# EAGLE board LEDDriver_v_3 (EAGLE 6.4)
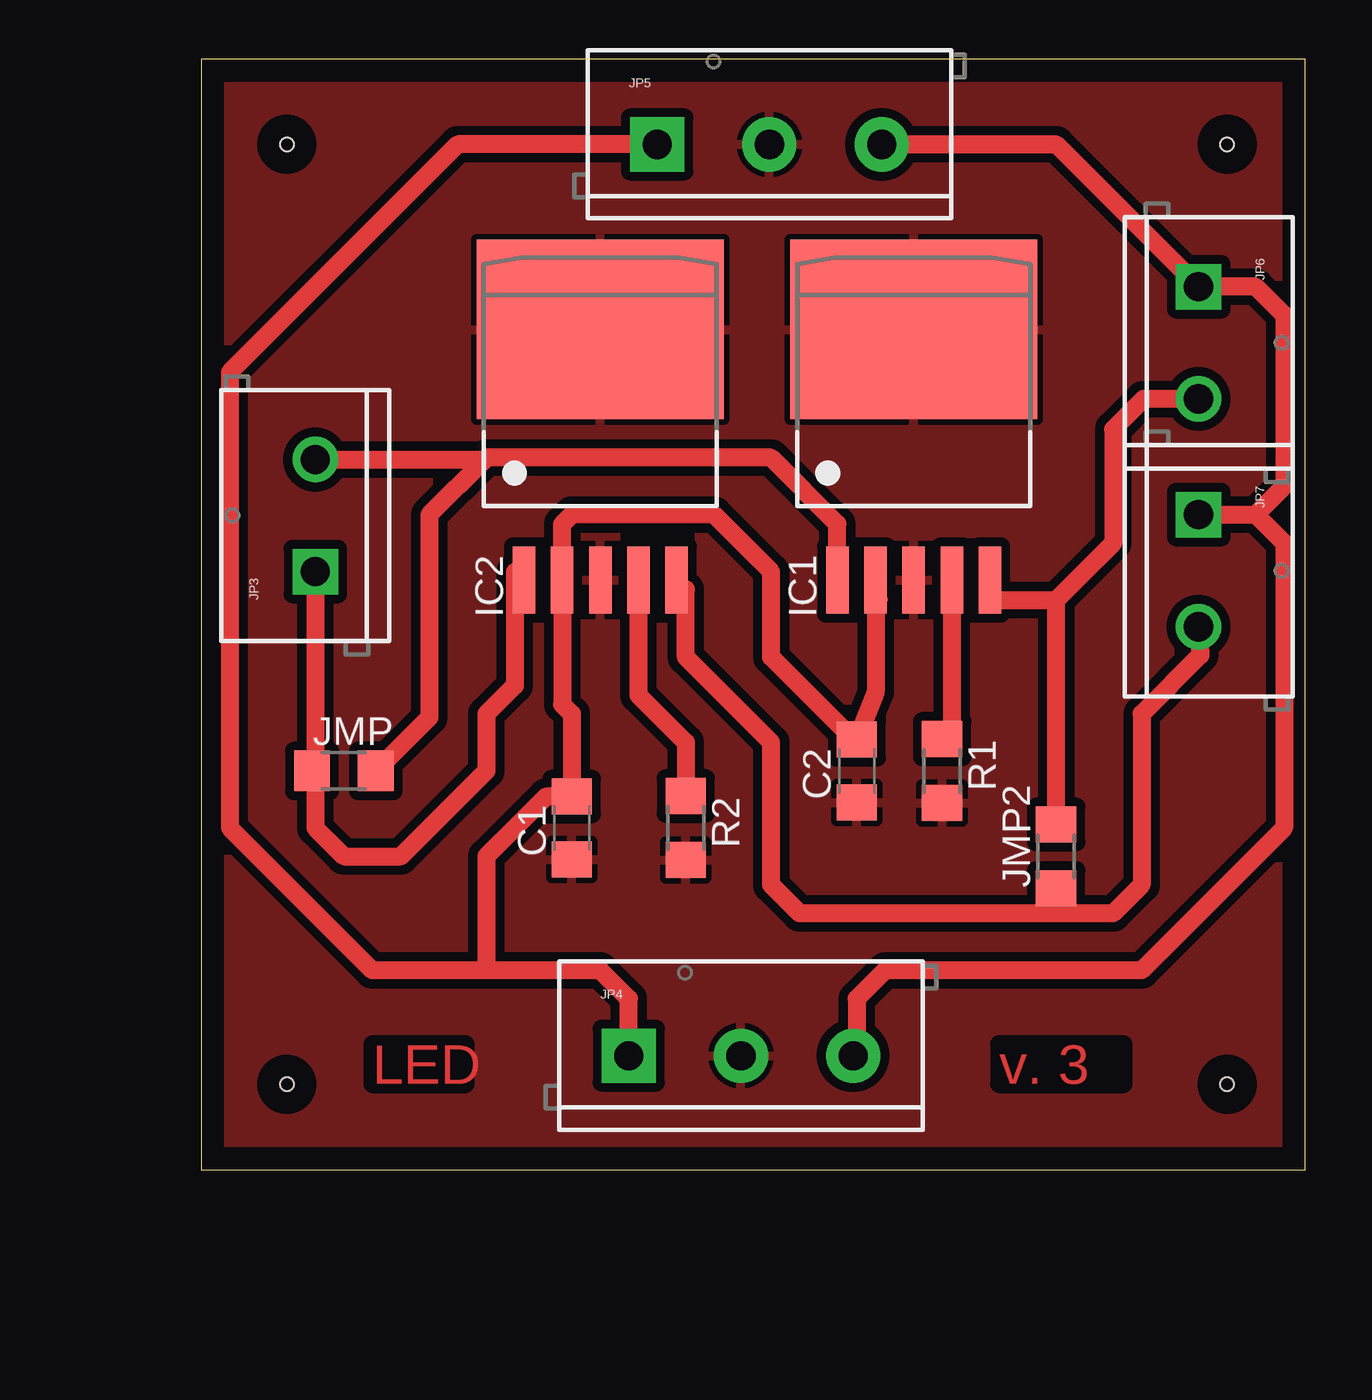
[diagram p0: board, top side]
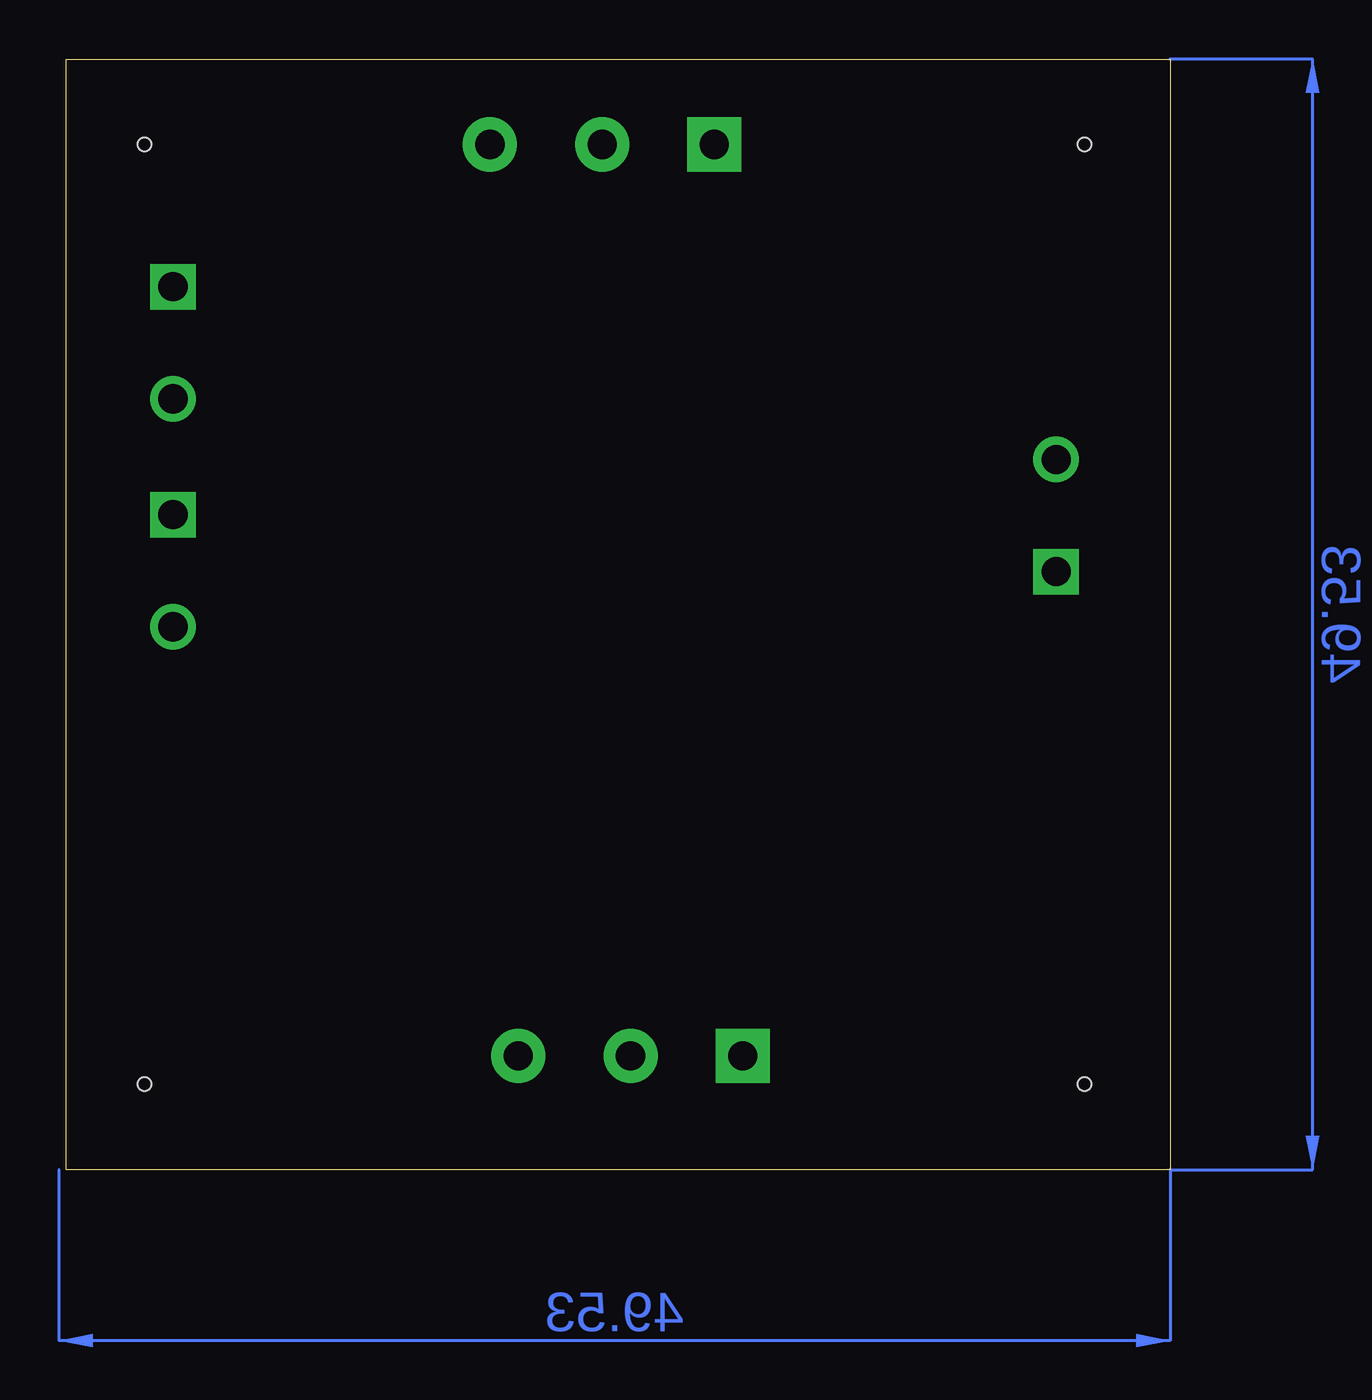
[diagram p1: board, bottom side, seen from below]

Size 49.2 x 49.52 mm. Coordinates in mm from the lower left corner, seen from the top.
Outline: 0,0 49.2,0 49.2,49.52 0,49.52 0,0
Copper layers (1*16): Top 0.035mm / dielectric 1.5mm / Bottom 0.035mm
Design rules "default *": minimum track width 10mil, minimum drill 24mil, track to track 15mil, track to pad 15mil, pad to pad 15mil, via to via 15mil, smd to smd 15mil, copper to edge 40mil, drill to drill 10mil, minimum pad ring 10mil, minimum via ring 8mil, stop-mask expansion 4mil, vias tented up to drill 0mil, thermal gap 10mil
Holes 0.6 mm at 45.72,3.81 45.72,45.72 3.81,45.72 3.81,3.81

## Footprints (pad centres in the part's own frame; a part is rotated, then mirrored left to right if it is on the bottom)
C1206 = smd 1.6 x 1.8: 1 -1.4,0; 2 1.4,0
TO263_5 = smd 1 x 3: 1 -3.4,-8; 2 -1.7,-8; 3 0,-8; 4 1.7,-8; 5 3.4,-8 | smd 11 x 8: TAB 0,3.175
R1206 = smd 1.6 x 1.803: 1 -1.422,0; 2 1.422,0
SCREWTERMINAL-5MM-2 = drill 1.3 pad 2.032 square: 1 0,0 | drill 1.3 pad 2.032: 2 5,0
SCREWTERMINAL-5MM-3 = drill 1.3 pad 2.413 square: 1 0,0 | drill 1.3 pad 2.413: 2 5,0; 3 10,0

## Placement (x,y rotation side)
C1  [C1206]  16.51,15.24 90 top
C2  [C1206]  29.21,17.78 90 top
IC1  CAT4101  [TO263_5]  31.75,34.29 0 top
IC2  CAT4101  [TO263_5]  17.78,34.29 0 top
JMP  CH  [R1206]  6.35,17.78 0 top
JMP2  AMP  [R1206]  38.1,13.97 90 top
JP3  M025MM  [SCREWTERMINAL-5MM-2]  5.08,26.67 90 top
JP4  [SCREWTERMINAL-5MM-3]  19.05,5.08 0 top
JP5  [SCREWTERMINAL-5MM-3]  20.32,45.72 0 top
JP6  M025MM  [SCREWTERMINAL-5MM-2]  44.45,39.37 270 top
JP7  M025MM  [SCREWTERMINAL-5MM-2]  44.45,29.21 270 top
R1  [R1206]  33.02,17.78 270 top
R2  [R1206]  21.59,15.24 270 top

## Library data of the parts
C1 C2 JMP JMP2 R1 R2 = adafruit
IC1 IC2 = on-semiconductor; MPN: CAT4101TV-T75; OC_FARNELL: 1718452; OC_NEWARK: 08R5264
JP3-JP7 = SparkFun-Connectors

## Nets
+5V: C1.2 C2.2 IC1.2 IC2.2 JP4.1 JP5.1
+12V: JP4.3 JP5.3 JP6.1 JP7.1
GND: C1.1 C2.1 IC1.3 IC1.TAB IC2.3 IC2.TAB JP4.2 JP5.2 R1.2 R2.2
N$1: IC1.1 JMP.2 JP3.2
N$2: IC2.1 JMP.1 JP3.1
N$3: IC1.4 R1.1
N$4: IC2.5 JMP2.1 JP7.2
N$5: IC1.5 JMP2.2 JP6.2
N$8: IC2.4 R2.1

## Tracks (layer width: path | path; a pad name or v marks a point on that pad's centre or on a via)
+5V
  Top 0.254: 30.48,25.4 IC1.2
  Top 0.813: IC1.2 30.05,21.29 C2.2 29.08,19.18 25.4,22.86 25.4,26.67 22.86,29.21 16.51,29.21 16.08,28.78 IC2.2 16.08,20.75 16.51,20.32 C1.2 15.37,16.64 12.7,13.97 12.7,8.89 | JP5.1 11.43,45.72 1.27,35.56 1.27,15.24 7.62,8.89 12.7,8.89 | JP4.1 19.05,7.62 17.78,8.89 12.7,8.89
+12V  (via drill 0.6 pad 1.68)
  Top 0.813: JP4.3 v29.21,5.08 29.21,7.62 30.48,8.89 41.91,8.89 48.26,15.24 48.26,27.94 46.99,29.21 | JP5.3 38.1,45.72 JP6.1 46.99,39.37 48.26,38.1 48.26,30.48 46.99,29.21 | JP7.1 46.99,29.21
GND
  pour Top (isolate 0.406): 0,49.53 49.53,49.53 49.53,0 0,0
N$1
  Top 0.406: 12.62,31.67 12.7,31.75
  Top 0.813: IC1.1 28.35,28.8 25.4,31.75 12.7,31.75 | JMP.2 10.16,20.17 10.16,29.21 12.62,31.67 JP3.2
N$2
  Top 0.254: 13.97,26.67 IC2.1
  Top 0.406: 5.08,17.63 JMP.1
  Top 0.813: 13.97,26.67 13.97,21.59 12.7,20.32 12.7,17.78 8.89,13.97 6.35,13.97 5.08,15.24 5.08,17.63 | JP3.1 5.08,17.93 JMP.1
N$3
  Top 0.254: 33.02,19.05 R1.1
  Top 0.813: IC1.4 33.45,19.63 R1.1
N$4
  Top 0.406: 21.59,25.88 IC2.5 | JMP2.1 38.1,11.43
  Top 0.813: JP7.2 44.53,22.94 41.91,20.32 41.91,12.7 40.64,11.43 38.1,11.43 26.67,11.43 25.4,12.7 25.4,19.05 21.59,22.86 21.59,25.88
N$5
  Top 0.254: 35.56,25.4 IC1.5
  Top 0.813: 35.56,25.4 38.1,25.4 | JP6.2 41.99,34.37 40.64,33.02 40.64,27.94 38.1,25.4 | JMP2.2 38.1,25.4
N$6  (via drill 0.6 pad 1.68)
  other vias: 44.45,24.13
N$7  (via drill 0.6 pad 1.68)
  other vias: 5.08,31.75
N$8
  Top 0.813: IC2.4 19.48,21.16 21.59,19.05 R2.1
N$9  (via drill 0.6 pad 1.68)
  other vias: 44.45,34.29
(copper drawn outside any net)
  shapes: Bottom area x2

## Text on the board
Top: LED | v. 3